# EAGLE board DS18B20Z-Flip-Test v7 (EAGLE 9.7.0)
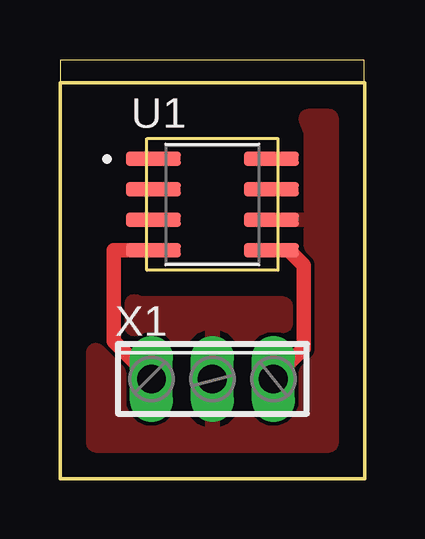
[diagram p0: board, top side]

Size 12.7 x 17.45 mm. Coordinates in mm from the lower left corner, seen from the top.
Outline: 12.7,0 12.68,1.27 12.68,17.45 0,17.45 0,16.51
Outline: 0,16.51 0,0 12.7,0
Outline: 0,16.51 12.7,16.51 12.7,0
Copper layers (1*16): Top / Bottom
Stack-up Default Layer Stack: Top User Defined 0.035mm / Dielectric-1 User Defined 1.5mm / Bottom User Defined 0.035mm
Design rules "default": minimum track width 6mil, minimum drill 0.35mm, track to track 6mil, track to pad 6mil, pad to pad 6mil, via to via 6mil, smd to smd 6mil, copper to edge 40mil, drill to drill 6mil, minimum pad ring 10mil, minimum via ring 8mil, stop-mask expansion 4mil, vias tented up to drill 0mil, thermal gap 10mil

## Footprints (pad centres in the part's own frame; a part is rotated, then mirrored left to right if it is on the bottom)
SOIC127P600X175-8N = smd 2.3 x 0.6: 1 -2.455,1.905; 2 -2.455,0.635; 3 -2.455,-0.635; 4 -2.455,-1.905; 5 2.455,-1.905; 6 2.455,-0.635; 7 2.455,0.635; 8 2.455,1.905
3POL254 = drill 1.2 long: 1 -2.54,0; 2 0,0; 3 2.54,0

## Placement (x,y rotation side)
U1  DS18B20Z  [SOIC127P600X175-8N]  6.35,11.43 0 top
X1  [3POL254]  6.35,4.16 0 top

## Library data of the parts
U1 = DS18B20Z-FLIP; MANUFACTURER: Maxim Integrated; PARTREV: 5; STANDARD: IPC7351B
X1 = con-phoenix-254; OC_FARNELL: unknown; OC_NEWARK: unknown

## Nets
N$1: U1.4 X1.1
N$2: U1.6 X1.2
N$3: U1.5 X1.3

## Tracks (layer width: path | path; a pad name or v marks a point on that pad's centre or on a via)
N$1
  Top 0.61: U1.4 2.23,9.53 2.23,5.74 X1.1
N$2
  pour Top: 0,16.51 12.7,16.51 12.7,0 0,0
N$3
  Top 0.61: U1.5 9.53,9.53 10.16,8.89 10.16,5.43 X1.3